# Altium PCB Breakout_16pin.PcbDoc
Units mm, origin at the board's own origin, x right, y up, seen from the top; angles counter-clockwise.
Board outline 55 x 25 mm, 2 copper layers (Top Layer, Bottom Layer), stack 1.571 mm thick; 7 components, 16 nets, 56 pads, 0 vias.
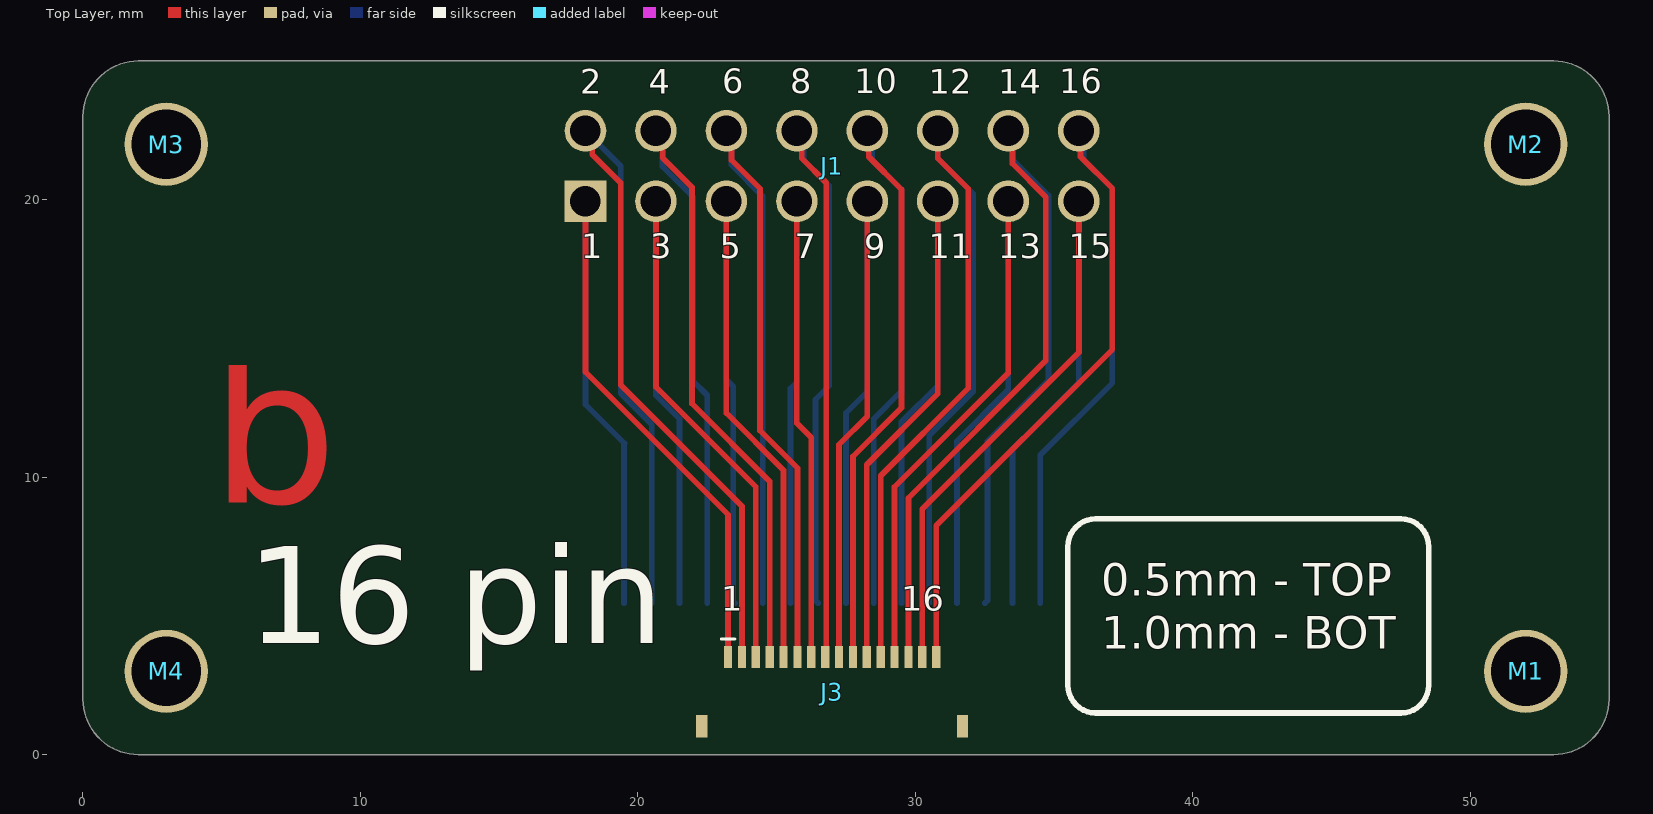
[diagram p0: Top Layer view]
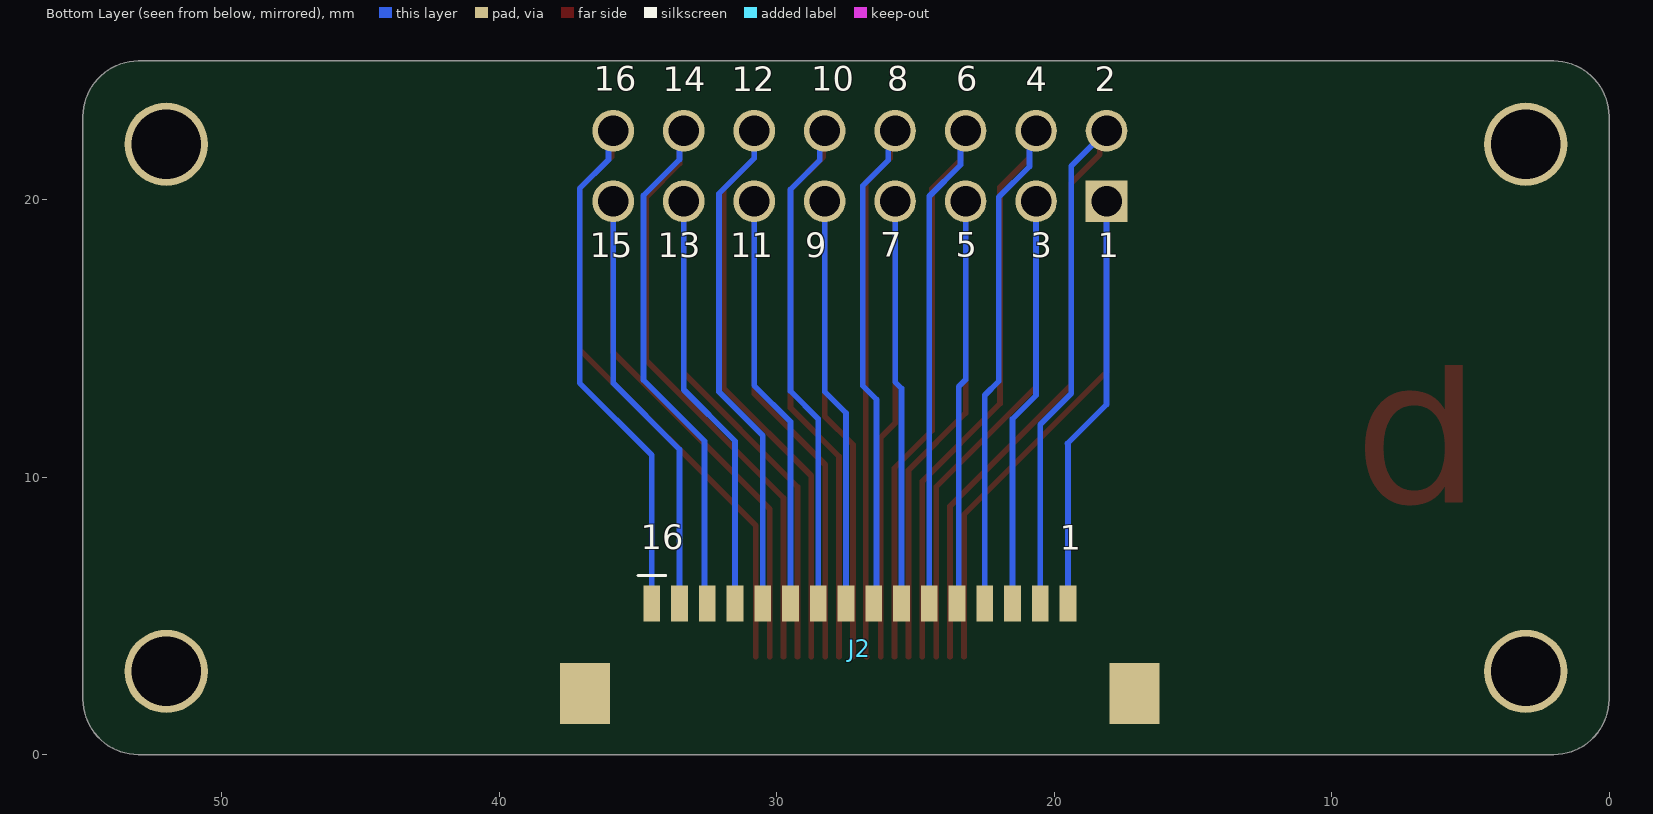
[diagram p1: Bottom Layer view, seen from below]

## Layer stack, top to bottom
Top Solder: solder mask 0.0102, Solder Resist, Dk 3.5
Top Layer: signal copper 0.0356
Dielectric 1: dielectric 1.5, FR-4, Dk 4.8
Bottom Layer: signal copper 0.0356
Bottom Solder: solder mask 0.0102, Solder Resist, Dk 3.5

## Board outline
2,0 cw(c2,2) 0,2 0,23 cw(c2,23) 2,25 53,25 cw(c53,23) 55,23 55,2 cw(c53,2) 53,0

## Design rules (kind name [scope] priority, off if disabled: settings)
Clearance [All] p1: gap=0.204 ignorepadtopadclearanceinfootprint=TRUE
DiffPairsRouting [All] p1: maxlimit=0.254 minlimit=0.064 mostfreqgap=0.127 toplayer_minwidth=0.178 toplayer_maxwidth=0.457 toplayer_prefwidth=0.457 bottomlayer_minwidth=0.178 bottomlayer_maxwidth=0.457 bottomlayer_prefwidth=0.457 impedanceprofiledriven=TRUE maxuncoupledlength=12.7
HoleSize [All] p1: absolutevalues=TRUE maxlimit=5 minlimit=0.153 maxpercent=80.000 minpercent=20.000
MinimumSolderMaskSliver [All] p1: minsoldermaskwidth=0.178
PolygonConnect [All] p1: connectstyle=Relief reliefconductorwidth=0.254 reliefentries=4 polygonreliefangle="90 Angle" airgapwidth=0.254
RoutingVias [All] p1: holewidth=0.305 width=0.61 viastyle="Through Hole" minholewidth=0.254 minwidth=0.508 maxholewidth=0.5 maxwidth=1.27
SolderMaskExpansion [All] p1: expansion=0.102 istentingtop=FALSE
Width [All] p1: maxlimit=25.4 minlimit=0.204 preferedwidth=0.254 minimp=50.000000 maximp=50.000000 favimp=50.000000
27 further rules are at their usual default settings.

## Components (designator, comment, footprint, x,y, rotation, side; value= is the part's Value field where it differs from the comment)
J1 "68602-116HLF" HDR-V-2X8-2.54MM 27,21.214 r0 top
J2 "XF3M(1)-1615-1B" CONN-FFC-H-16P-1MM 27,3.829 r180 bottom
J3 "FFC2B28-16-G" CONN-FFC-H-16P-0.5MM 27,2.272 r0 top
M1 "MTG_HOLE" MH_P_2.5MM 52,3 r90 top
M2 "MTG_HOLE" MH_P_2.5MM 52,22 r90 top
M3 "MTG_HOLE" MH_P_2.5MM 3,22 r90 top
M4 "MTG_HOLE" MH_P_2.5MM 3,3 r90 top

## Footprints (in the part's own frame and the unit in brackets; to place one, negate y for a bottom-side part, rotate by r counter-clockwise, add the part's x,y. Pads: shape width x height; smd on the part's side, far side on the other; paste and mask are expansions set on the pad)
CONN-FFC-H-16P-0.5MM [mm]
  rect 0.3x0.8 smd: 1(-3.75,1.25) 2(-3.25,1.25) 3(-2.75,1.25) 4(-2.25,1.25) 5(-1.75,1.25) 6(-1.25,1.25) 7(-0.75,1.25) 8(-0.25,1.25) 9(0.25,1.25) 10(0.75,1.25) 11(1.25,1.25) 12(1.75,1.25) 13(2.25,1.25) 14(2.75,1.25) 15(3.25,1.25) 16(3.75,1.25)
  rect 0.4x0.8 smd: ME1(-4.7,-1.25) ME2(4.7,-1.25)
  silkscreen extent -4,1.9 -3.5,1.9, body extent -5,-1.8 5,1.45, height 1.72
CONN-FFC-H-16P-1MM [mm]
  rect 0.6x1.3 smd: 1(-7.5,1.625) 2(-6.5,1.625) 3(-5.5,1.625) 4(-4.5,1.625) 5(-3.5,1.625) 6(-2.5,1.625) 7(-1.5,1.625) 8(-0.5,1.625) 9(0.5,1.625) 10(1.5,1.625) 11(2.5,1.625) 12(3.5,1.625) 13(4.5,1.625) 14(5.5,1.625) 15(6.5,1.625) 16(7.5,1.625)
  rect 1.8x2.2 smd: ME1(-9.9,-1.625) ME2(9.9,-1.625)
  silkscreen extent -8,2.63 -7,2.63, body extent -10.3,-3.68 10.3,2.73, height 2
HDR-V-2X8-2.54MM [mm]
  rect 1.5x1.5 hole 1.1: 1(-8.89,-1.27)
  round 1.5 hole 1.1: 2(-8.89,1.27) 3(-6.35,-1.27) 4(-6.35,1.27) 5(-3.81,-1.27) 6(-3.81,1.27) 7(-1.27,-1.27) 8(-1.27,1.27) 9(1.27,-1.27) 10(1.27,1.27) 11(3.81,-1.27) 12(3.81,1.27) 13(6.35,-1.27) 14(6.35,1.27) 15(8.89,-1.27) 16(8.89,1.27)
  body extent -10.26,-2.41 10.26,2.42, height 8.19
MH_P_2.5MM [mm]
  round 3 hole 2.5: 1(0,0)

## Part data
J1: library part HDR-V-2X8-M-2.54MM, "Conn Unshrouded Header HDR 16 POS 2.54mm Solder ST Top Entry Thru-Hole BergStik® Bulk", Color=Black, Current Rating=3A, Flammability Rating="UL94 V-0", Insulation Resistance=5GR, Manufacturer 1="Amphenol ICC / FCI", Max Operating Temperature=125°C, Max Voltage Rating (AC)=1.5kV, Min Operating Temperature=-65°C, Package Quantity=100, Supplier Part Number=38AH4644, Category="Headers and Wire Housings", ComponentLink1Description=https://datasheet.ciiva.com/5157/67996-225486-5157197.pdf?src-supplier=Mouser, ComponentLink1URL=https://datasheet.ciiva.com/5157/67996-225486-5157197.pdf?src-supplier=Mouser, ComponentLink2Description=https://datasheet.ciiva.com/9465/67996-9465931.pdf?src-supplier=Avnet, ComponentLink2URL=https://datasheet.ciiva.com/9465/67996-9465931.pdf?src-supplier=Avnet, ComponentLink3Description=https://datasheet.ciiva.com/728/67996-728940.pdf?src-supplier=Digi-Key, ComponentLink3URL=https://datasheet.ciiva.com/728/67996-728940.pdf?src-supplier=Digi-Key, Contact Gender=Male, Contact Material=Bronze, Contact Mating Length=0.23inch, Contact Plating=Gold,GXT, Contact Post Length=3.81mm, Contact Type="Male Pin", Depth=4.83mm, Gender=Male, Housing Color=Black, Housing Material=Thermoplastic, Length=20.32mm, Manufacturer Part Number 1=68602-116HLF, Mounting Technology="Through Hole", Number of Contacts=16, Number of Positions=16, Number of Rows=2, Orientation=Straight, Packaging=Bulk, Pitch=2.54mm, Pricing="1=1.38, 10=1.13, 25=1.12, 50=1.08, 100=1.07, 250=0.991, 300=0.991, 500=0.909, 1000=0.826 (USD)", Radiation Hardening=No, Reach SVHC Compliant=No, RoHS=Yes, RoHS Compliant=Yes, Row Spacing=0.1inch, Series="BERGSTIK® II, MezzSelect™, Basics+", Stock=800, Supplier=Newark, Termination=Solder, Voltage Rating=1.5kV
J2: library part CONN-FFC-H-16P-1MM, "1.0-mm Pitch, Dual Contact ; For FPC/FFC, 16 Contacts, RoHS", Actuator Color=Black, Current Rating=500mA, Flammability Rating="UL94 V-0", Housing Color=Natural, Manufacturer 1=Omron, Max Operating Temperature=85°C, Min Operating Temperature=-30°C, Package Quantity=1500, Supplier Part Number=Z5876CT-ND, Voltage Rating=50V, Actuator Material="Polymer,Liquid Crystal Polymer", Category="FFC / FPC", ComponentLink1Description=http://datasheet.octopart.com/XF3M%281%29-1615-1B-Omron-datasheet-62282188.pdf?src-supplier=Onlinecomponents.com, ComponentLink1URL=http://datasheet.octopart.com/XF3M%281%29-1615-1B-Omron-datasheet-62282188.pdf?src-supplier=Onlinecomponents.com, ComponentLink2Description=http://datasheet.octopart.com/XF3M%281%29-1615-1B-Omron-datasheet-62282188.pdf?src-supplier=Allied+Electronics, ComponentLink2URL=http://datasheet.octopart.com/XF3M%281%29-1615-1B-Omron-datasheet-62282188.pdf?src-supplier=Allied+Electronics, ComponentLink3Description=http://datasheet.octopart.com/XF3M%281%29-1615-1B-Omron-datasheet-62282188.pdf?src-supplier=Avnet, ComponentLink3URL=http://datasheet.octopart.com/XF3M%281%29-1615-1B-Omron-datasheet-62282188.pdf?src-supplier=Avnet, ComponentLink4Description=http://datasheet.octopart.com/XF3M%281%29-1615-1B-Omron-datasheet-62282188.pdf?src-supplier=Mouser, ComponentLink4URL=http://datasheet.octopart.com/XF3M%281%29-1615-1B-Omron-datasheet-62282188.pdf?src-supplier=Mouser, ComponentLink5Description=http://www.omron.com/ecb/products/pdf/en-xf3m.pdf?src-supplier=Digi-Key, ComponentLink5URL=http://www.omron.com/ecb/products/pdf/en-xf3m.pdf?src-supplier=Digi-Key, ComponentLink6Description=http://datasheet.octopart.com/XF3M%281%29-1615-1B-Omron-datasheet-62282188.pdf?src-supplier=Digi-Key, ComponentLink6URL=http://datasheet.octopart.com/XF3M%281%29-1615-1B-Omron-datasheet-62282188.pdf?src-supplier=Digi-Key, ComponentLink7Description=http://datasheet.octopart.com/XF3M%281%29-1615-1B-Omron-datasheet-62282188.pdf?src-supplier=Verical, ComponentLink7URL=http://datasheet.octopart.com/XF3M%281%29-1615-1B-Omron-datasheet-62282188.pdf?src-supplier=Verical, ComponentLink8Description=http://datasheet.octopart.com/XF3M%281%29-1615-1B-Omron-datasheet-62282188.pdf?src-supplier=Newark, ComponentLink8URL=http://datasheet.octopart.com/XF3M%281%29-1615-1B-Omron-datasheet-62282188.pdf?src-supplier=Newark, ComponentLink9Description=https://datasheet.octopart.com/XF3M%281%29-1615-1B-Omron-datasheet-62282188.pdf?src-supplier=Master+Electronics, ComponentLink9URL=https://datasheet.octopart.com/XF3M%281%29-1615-1B-Omron-datasheet-62282188.pdf?src-supplier=Master+Electronics, ComponentLink10Description=http://datasheet.octopart.com/XF3M%281%29-1615-1B-Omron-datasheet-62282188.pdf?src-supplier=Sager+Electronics, ComponentLink10URL=http://datasheet.octopart.com/XF3M%281%29-1615-1B-Omron-datasheet-62282188.pdf?src-supplier=Sager+Electronics, ComponentLink11Description=http://datasheet.octopart.com/XF3M%281%29-1615-1B-Omron-datasheet-62282188.pdf?src-supplier=Heilind+Electronics, ComponentLink11URL=http://datasheet.octopart.com/XF3M%281%29-1615-1B-Omron-datasheet-62282188.pdf?src-supplier=Heilind+Electronics, Contact Material="Copper Alloy", Contact Plating=Gold, Housing Material=Polymer, Manufacturer Part Number 1=XF3M(1)-1615-1B, Mating Cycles=20, Mounting Technology="Surface Mount", Number of Positions=16, Number of Rows=1, Orientation="Right Angle", Packaging="Tape and Reel", Pitch=0.039inch, Pricing="1=1.77, 10=1.542, 25=1.476, 50=1.4432, 100=1.3776, 250=1.2464, 500=1.148 (USD)", RoHS=Yes, RoHS Compliant=Yes, Series=XF3M, Stock=1621, Supplier=Digi-Key, Termination=Solder
J3: library part CONN-FFC-H-16P-0.5MM, "16 Position FFC, FPC Connector Contacts, Top and Bottom 0.020\" (0.50mm) Surface Mount, Right Angle", Manufacturer 1="Global Connector Technology", Manufacturer Part Number 1=FFC2B28-16-G, Number of Positions=16, Pitch=0.5mm
M1 M2 M3 M4: "MTG HOLE PLATED VARIOUS SIZES"

## Nets (pads, with @x,y where several pads share a name; then routed paths per layer and width w, separated by ;. In a path a pad name is that pad's centre, name@x,y a point inside that pad or via, vN(x,y) a via of type N, cw(c..) or ccw(c..) an arc to the next point about the centre after c; other vN are vias at no path point)
1: J1.1 J2.16 J3.1 | length 33.6
  Top Layer w0.204: J1.1 18.11,13.79 23.25,8.65 J3.1
  Bottom Layer w0.204: J1.1 18.11,12.621 19.515,11.215 19.5,11.2 J2.16
2: J1.2 J2.15 J3.2 | length 39.3
  Top Layer w0.204: J1.2 18.349,22.245 18.349,21.638 19.38,20.607 19.38,13.32 23.75,8.95 J3.2
  Bottom Layer w0.204: J1.2 19.38,21.214 19.38,13.02 20.5,11.9 J2.15
3: J1.3 J2.14 J3.3 | length 32.8
  Top Layer w0.204: J1.3 20.65,13.25 24.25,9.65 J3.3
  Bottom Layer w0.204: J1.3 20.65,12.95 21.5,12.1 J2.14
4: J1.4 J2.13 J3.4 | length 38.5
  Top Layer w0.204: J1.4 20.898,22.236 20.898,21.502 21.95,20.45 21.95,12.65 24.75,9.85 J3.4
  Bottom Layer w0.204: J1.4 20.887,22.247 20.887,21.2 22,20.087 22,13.452 22.5,12.952 J2.13
5: J1.5 J2.12 J3.5 | length 32.5
  Top Layer w0.204: J1.5@23.19,20.31 23.19,12.31 25.25,10.25 J3.5
  Bottom Layer w0.204: J1.5@23.19,20.21 23.19,13.51 23.438,13.262 23.438,5.516 J2.12
6: J1.6 J2.11 J3.6 | length 37.6
  Top Layer w0.204: J1.6 23.372,22.302 23.372,21.428 24.4,20.4 24.4,11.677 25.75,10.327 J3.6
  Bottom Layer w0.204: J1.6 23.372,22.302 23.372,21.255 24.5,20.127 J2.11
7: J1.7 J2.10 J3.7 | length 32
  Top Layer w0.204: J1.7@25.73,20.27 25.73,11.945 26.25,11.425 J3.7
  Bottom Layer w0.204: J2.10 25.5,13.2 25.73,13.43 J1.7@25.73,20.37
8: J1.8 J2.9 J3.8 | length 37.2
  Top Layer w0.204: J1.8 25.9,22.314 25.9,21.5 26.786,20.614 26.786,3.558 J3.8
  Bottom Layer w0.204: J1.8 25.972,22.242 25.972,21.428 26.9,20.5 26.9,13.3 26.4,12.8 26.4,5.554 J2.9
9: J1.9 J2.8 J3.9 | length 32
  Top Layer w0.204: J3.9 27.25,11.175 28.27,12.195 J1.9 J1.9@28.27,20.33
  Bottom Layer w0.204: J2.8 27.5,12.314 28.27,13.084 J1.9
10: J1.10 J2.7 J3.10 | length 38.1
  Top Layer w0.204: J3.10 27.75,10.75 29.5,12.5 29.5,20.37 28.323,21.547 28.323,22.431 J1.10
  Bottom Layer w0.204: J1.10 28.442,22.312 28.442,21.428 29.5,20.37 29.5,13.1 28.5,12.1 J2.7
11: J1.11 J2.6 J3.11 | length 33
  Top Layer w0.204: J3.11 28.25,10.45 30.81,13.01 J1.11@30.81,20.19
  Bottom Layer w0.204: J2.6 29.5,12 30.81,13.31 J1.11@30.81,20.19
12: J1.12 J2.5 J3.12 | length 38.9
  Top Layer w0.204: J3.12 28.75,10.05 31.9,13.2 31.9,20.4 30.81,21.49 J1.12
  Bottom Layer w0.204: J2.5 30.5,11.5 32.08,13.08 32.08,20.22 30.81,21.49 J1.12
13: J1.13 J2.4 J3.13 | length 33.9
  Top Layer w0.204: J3.13 29.25,9.65 33.35,13.75 J1.13@33.35,20.25
  Bottom Layer w0.204: J2.4 31.5,11.3 33.35,13.15 J1.13@33.35,20.167
14: J1.14 J2.3 J3.14 | length 40.2
  Top Layer w0.204: J3.14 29.75,9.25 34.7,14.2 34.7,20.1 33.5,21.3 33.5,22.334 J1.14
  Bottom Layer w0.204: J2.3 32.6,5.554 32.6,11.3 34.8,13.5 34.8,20.15 33.5,21.45 33.5,22.334 J1.14
15: J1.15 J2.2 J3.15 | length 34.2
  Top Layer w0.204: J3.15 30.25,8.85 35.9,14.5 35.9,19.934 J1.15
  Bottom Layer w0.204: J2.2 33.5,11 35.89,13.39 J1.15
16: J1.16 J2.1 J3.16 | length 40.7
  Top Layer w0.204: J3.16 30.75,8.25 37.1,14.6 37.1,20.4 35.953,21.547 35.953,22.421 J1.16
  Bottom Layer w0.204: J2.1 34.5,10.8 37.1,13.4 37.1,20.4 36.058,21.442 36.058,22.316 J1.16
pads on no net: J2.ME1 J2.ME2 J3.ME1 J3.ME2 M1.1 M2.1 M3.1 M4.1

## Other copper
Top Layer:
  text "b" at 4.6,6.8 h12

## Silkscreen, mask and mechanical layers (free items; w line width, h text height)
Top Overlay:
  lines w0.2: 35.5,2.5 ccw(c36.5,2.5) 36.5,1.5 47.5,1.5 ccw(c47.5,2.5) 48.5,2.5 48.5,7.5 ccw(c47.5,7.5) 47.5,8.5 36.5,8.5 ccw(c36.5,7.5) 35.5,7.5 35.5,2.5 ; 35.5,2.5 35.5,2.5
  text "6" at 23.034,23.545 h1.5
  text "8" at 25.492,23.545 h1.5
  text "10" at 27.792,23.545 h1.5
  text "16" at 35.178,23.545 h1.5
  text "2" at 17.917,23.529 h1.5
  text "4" at 20.397,23.529 h1.5
  text "12" at 30.478,23.529 h1.5
  text "14" at 32.978,23.529 h1.5
  text "1" at 17.95,17.593 h1.5
  text "3" at 20.45,17.609 h1.5
  text "5" at 22.95,17.609 h1.5
  text "7" at 25.65,17.593 h1.5
  text "9" at 28.15,17.609 h1.5
  text "11" at 30.478,17.593 h1.5
  text "13" at 32.978,17.609 h1.5
  text "15" at 35.528,17.609 h1.5
  text "0.5mm - TOP" at 36.7,5.338 h2
  text "1" at 23,4.9 h1.5
  text "16" at 29.5,4.9 h1.5
  text "1.0mm - BOT" at 36.7,3.421 h2
  text "16 pin" at 5.9,2.868 h6
  text "c" at 3.169,-11.943 h50
Bottom Overlay:
  text "6" at 23.532,23.645 h1.5
  text "8" at 26.014,23.645 h1.5
  text "10" at 28.754,23.645 h1.5
  text "16" at 36.6,23.645 h1.5
  text "2" at 18.537,23.629 h1.5
  text "4" at 21.019,23.629 h1.5
  text "12" at 31.623,23.629 h1.5
  text "14" at 34.1,23.629 h1.5
  text "1" at 18.42,17.645 h1.5
  text "3" at 20.849,17.645 h1.5
  text "5" at 23.553,17.661 h1.5
  text "7" at 26.266,17.661 h1.5
  text "9" at 28.963,17.645 h1.5
  text "11" at 31.67,17.645 h1.5
  text "13" at 34.29,17.645 h1.5
  text "15" at 36.728,17.645 h1.5
  text "1" at 19.8,7.1 h1.5
  text "16" at 34.9,7.116 h1.5
Board Outline:
  lines w0.1: 27,25 27.5,25 ; 0,2 ccw(c2,2) 2,0 53,0 ccw(c53,2) 55,2 55,23 ccw(c53,23) 53,25 2,25 ccw(c2,23) 0,23 0,2